# Altium PCB main.PcbDoc
Units mm, origin at the board's own origin, x right, y up, seen from the top; angles counter-clockwise.
Board outline 42.4 x 86 mm, 2 copper layers (Top Layer, Bottom Layer), stack 1.569 mm thick; 13 components, 11 nets, 40 pads, 16 vias.
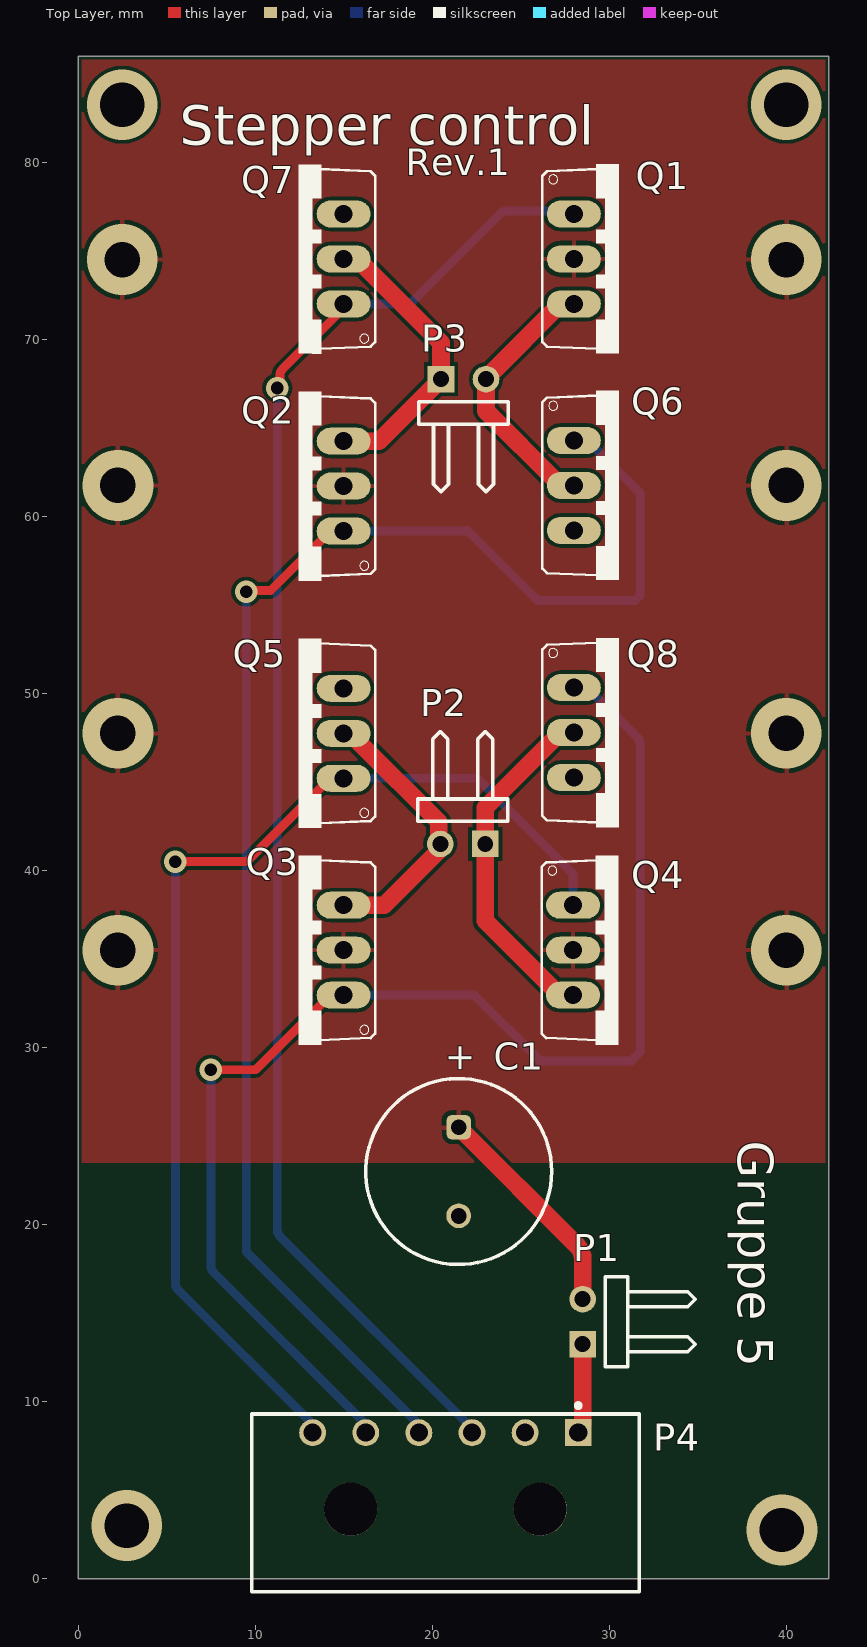
[diagram p0: Top Layer view]
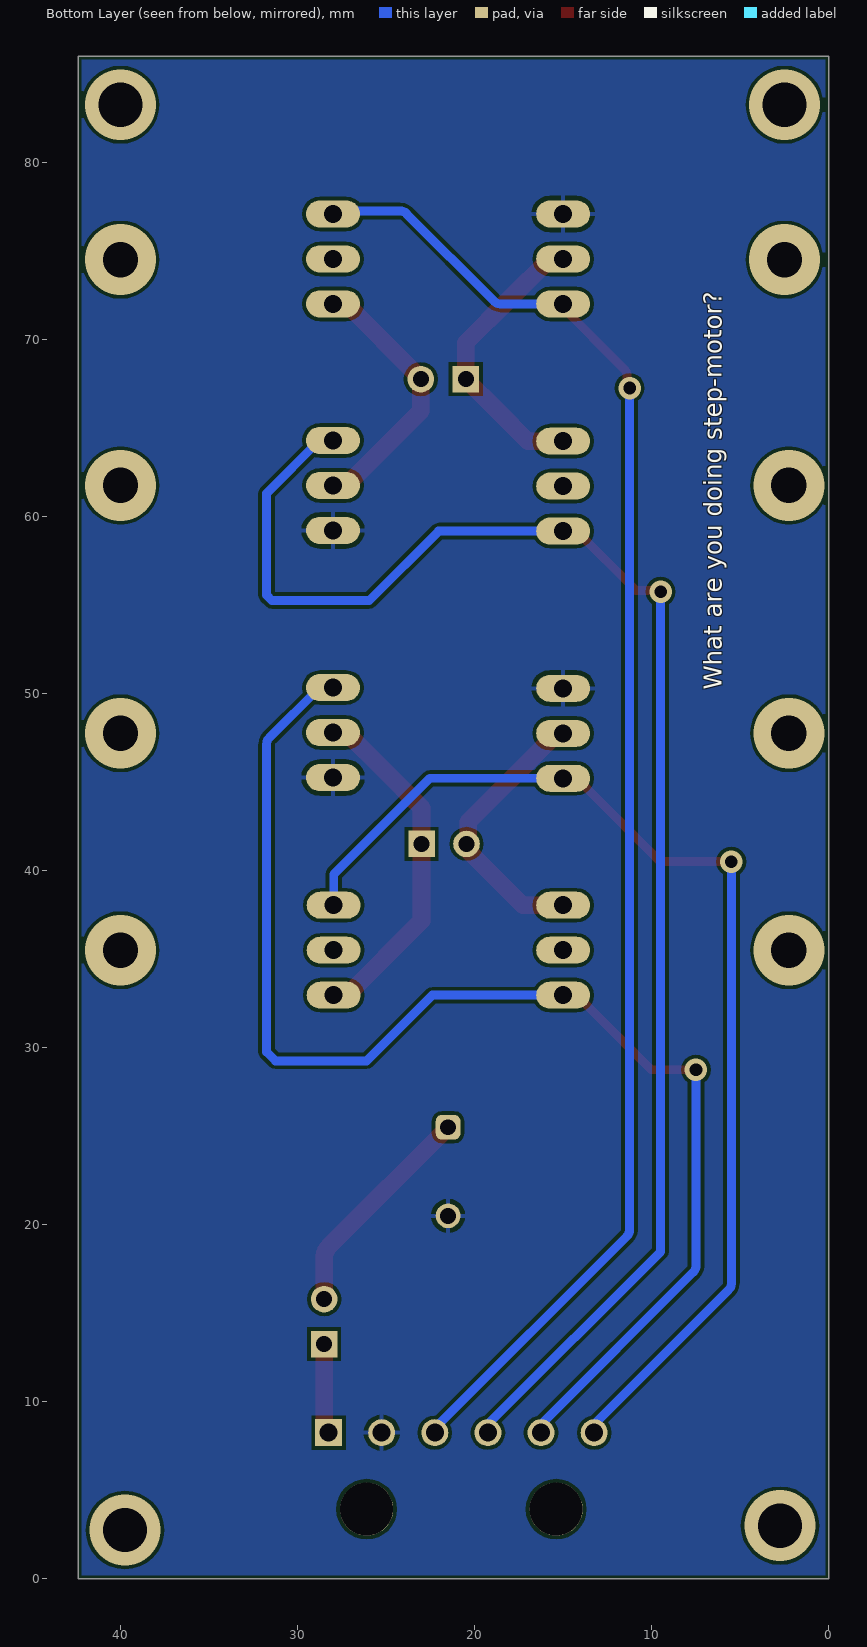
[diagram p1: Bottom Layer view, seen from below]

## Layer stack, top to bottom
Top Solder: solder mask 0.0254, SM-001, Dk 4
Top Layer: signal copper 0.035
Dielectric 1: core 1.4986, Core-043, Dk 4.3
Bottom Layer: signal copper 0.035
Bottom Solder: solder mask 0.0254, SM-001, Dk 4

## Board outline
0,0 0,86 42.4,86 42.4,0

## Design rules (kind name [scope] priority, off if disabled: settings)
BoardOutlineClearance [All] p1: gap=0.2 ignorepadtopadclearanceinfootprint=FALSE except(0: Arc-SplitContinuation Track-SplitContinuation SMDPad-SplitContinuation THPad-SplitContinuation Via-SplitContinuation Fill-SplitContinuation Poly-SplitContinuation Region-SplitContinuation Text-SplitContinuation)
Clearance ClearanceOuter [(OnLayer('Bottom Layer') OR OnLayer('Top Layer'))] p1: gap=0.2 ignorepadtopadclearanceinfootprint=FALSE except(0: SMDPad-Hole THPad-Hole Via-Hole Fill-Hole Poly-Hole Region-Hole Text-Hole; 0.199: Arc-SMDPad Track-SMDPad SMDPad-SMDPad; 0.249: Arc-Arc Arc-Track Track-Track; 0.25: Arc-THPad Arc-Via Track-THPad Track-Via; 0.45: Arc-Hole Track-Hole)
Clearance ClearanceInner [All] p2: gap=0.2 ignorepadtopadclearanceinfootprint=FALSE except(0: Arc-Hole Track-Hole SMDPad-Hole THPad-Hole Via-Hole Fill-Hole Poly-Hole Region-Hole Text-Hole; 0.199: Arc-Arc Arc-Track Arc-SMDPad Track-Track Track-SMDPad SMDPad-SMDPad)
DiffPairsRouting [All] p1: maxlimit=0.5 minlimit=0.5 mostfreqgap=0.5 toplayer_minwidth=0.2 toplayer_maxwidth=0.25 toplayer_prefwidth=0.25 bottomlayer_minwidth=0.2 bottomlayer_maxwidth=0.25 bottomlayer_prefwidth=0.25 maxuncoupledlength=10
HoleSize [All] p1: absolutevalues=TRUE maxlimit=5.35 minlimit=0.25 maxpercent=80.000 minpercent=20.000
HoleToHoleClearance [All] p1: gap=0.3 allowstackedmicrovias=TRUE
MinimumAnnularRing MinimumAnnularRingOuter [(OnLayer('Bottom Layer') OR OnLayer('Top Layer'))] p1: minimumring=0.2
MinimumAnnularRing MinimumAnnularRingInner [All] p2: minimumring=0.2
MinimumSolderMaskSliver [All] p1: minsoldermaskwidth=0.08
PolygonConnect [All] p1: connectstyle=Relief reliefconductorwidth=0.254 reliefentries=4 polygonreliefangle="90 Angle" airgapwidth=0.254
RoutingCorners [All] p1: cornerstyle=45-Degree minsetback=0.2 maxsetback=0.2
RoutingVias [All] p1: holewidth=0.3 width=0.6 viastyle="Through Hole" minholewidth=0.2 minwidth=0.55 maxholewidth=6 maxwidth=12
SilkToSilkClearance [All] p1: silktosilkclearance=0.2
SilkToSolderMaskClearance [IsPad] p1: minsilkscreentomaskgap=0.15 clearancetoexposedcopper=TRUE
SolderMaskExpansion [All] p1: expansion=0.05 istentingtop=FALSE
Width TraceWidthOuter [(OnLayer('Bottom Layer') OR OnLayer('Top Layer'))] p1: maxlimit=10 minlimit=0.2 preferedwidth=0.2 minimp=50.000000 maximp=50.000000 favimp=50.000000
Width TraceWidthInner [All] p2: maxlimit=10 minlimit=0.15 preferedwidth=0.2 minimp=50.000000 maximp=50.000000 favimp=50.000000
23 further rules are at their usual default settings.

## Classes and differential pairs
component class main: C1 P1 P2 P4 Q1 Q2 Q3 Q4 Q5 Q6 Q7

## Components (designator, comment, footprint, x,y, rotation, side; value= is the part's Value field where it differs from the comment)
C1 "100uF, 63V" WCAP-ATG8_D10H12.5 21.5,23 r90 top
P1 "BRYTER" HDR1X2H 28.5,13.25 r90 top
P2 "Spole 2" HDR1X2H 23,41.5 r180 top
P3 "Spole 1" HDR1X2H 20.5,67.75 r0 top
P4 "66200611022" 66200611022 20.75,4.28 r0 top
Q1 "IRF520" TO220BV 30.54,74.54 r270 top
Q2 "IRF520" TO220BV 12.46,61.71 r90 top
Q3 "IRF520" TO220BV 12.46,35.5 r90 top
Q4 "IRF520" TO220BV 30.5,35.5 r270 top
Q5 "IRF520" TO220BV 12.46,47.75 r90 top
Q6 "IRF520" TO220BV 30.54,61.75 r270 top
Q7 "IRF520" TO220BV 12.46,74.54 r90 top
Q8 "IRF520" TO220BV 30.54,47.79 r270 top

## Footprints (in the part's own frame and the unit in brackets; to place one, negate y for a bottom-side part, rotate by r counter-clockwise, add the part's x,y. Pads: shape width x height; smd on the part's side, far side on the other; paste and mask are expansions set on the pad)
66200611022 [mm] "3.00mm Male Single Row Angled Header with Plastic Pegs, 6p"
  rect 1.52x1.52 hole 1.02: 1(7.5,3.97)
  round 1.52 hole 1.02: 2(4.5,3.97) 3(1.5,3.97) 4(-1.5,3.97) 5(-4.5,3.97) 6(-7.5,3.97)
  round 3 hole 3 unplated: MH1(-5.35,-0.35) MH2(5.35,-0.35)
  silkscreen extent -10.95,-5.02 10.95,5.62, body extent -10.83,-4.95 10.83,4.95, height 5.6
HDR1X2H [mm] "Connector; Header; 2 Position; Right Angle"
  rect 1.5x1.5 hole 0.9: 1(0,0)
  round 1.5 hole 0.9: 2(2.54,0)
  silkscreen extent -1.27,-6.35 3.81,-1.27
TO220BV [mil]
  oval 60x120 hole 40: D(0,-100) G(-100,-100) S(100,-100)
  silkscreen extent -210,-170 210,0
WCAP-ATG8_D10H12.5 [mm] "Aluminum Electrolytic Capacitors, 10x12.5mm"
  rrect50% 1.4x1.4 hole 0.9: 1(2.5,0)
  round 1.4 hole 0.9: 2(-2.5,0)
  silkscreen extent -5.25,-5.25 5.25,5.25, body extent -4.99,-5 5,5, height 12.81

## Part data
C1: library part 860010775014, "WCAP-ATG8 Aluminum Electrolytic Capacitor, Radial, THT, D10xH12.5, 100uF, 63V", Capacitance=100uF, Capacitance Tolerance=+/-20%, Leakage Current=63uA, Manufacturer="Wurth Elektronik", Operating Temperature="-40 to +85degC", Rated Voltage=63VDC, Ripple Current=330mA, ComponentLink1Description=Manufacturer, ComponentLink1URL=http://www.we-online.de, ComponentLink2Description=Datasheet, ComponentLink2URL=https://www.we-online.com/catalog/datasheet/860010775014.pdf, Diameter=10mm, Dissipation Factor=9%, Endurance=2000h, Height=12.5mm, Manufacturer Part Number=860010775014, Mounting Technology=THT, Packaging="Ammo Pack", Published Date="October 2020", Technical Reference=ATBF125101M063DSPA9B000
P1 P2 P3: library part "Header 2H", "Header, 2-Pin, Right Angle / BRYTER", LatestRevisionDate=17-Jul-2002, LatestRevisionNote="Re-released for DXP Platform.", Publisher="Altium Limited"
P4: "THT Male Header WR-MPC3, with Snap-in Plastic Pegs, Right Angled, Single Row, pitch 3 mm, 6 pins", Contact Resistance="10 mOhm", Operating Temperature="-40 to 105 degC", Working Voltage="250 VAC", ComponentLink1Description=Manufacturer, ComponentLink1URL=http://www.we-online.de, ComponentLink2Description=Datasheet, ComponentLink2URL=https://katalog.we-online.de/em/datasheet/6620xx11022.pdf, Gender=Male, Mounting Technology=THT, Orientation="Right Angled", Packaging=Tube, Part Number=66200611022, Pin Number=6, Pitch="3 mm", Published Date="September 2018", Publisher="Wurth Elektronik"
Q1 Q2 Q3 Q4 Q5 Q6 Q7 Q8: "N-Channel 100V 9.2A _Tc_ 60W _Tc_ Through Hole TO-220AB", Package="TO-220 Vishay Siliconix", Availability=Unavailable, MF="Vishay Siliconix", MP=IRF520, Price=None, SnapEDA_Link=https://www.snapeda.com/parts/IRF520/Vishay%20Siliconix/view-part/522447/?ref=snap

## Via types
v1: diameter 4, hole 2, Top Layer to Bottom Layer, 8 vias
v2: diameter 4, hole 2.5, Top Layer to Bottom Layer, 4 vias
v3: diameter 1.27, hole 0.711, Top Layer to Bottom Layer, 4 vias

## Nets (pads, with @x,y where several pads share a name; then routed paths per layer and width w, separated by ;. In a path a pad name is that pad's centre, name@x,y a point inside that pad or via, vN(x,y) a via of type N, cw(c..) or ccw(c..) an arc to the next point about the centre after c; other vN are vias at no path point)
5v: C1.1 P1.2 Q1.D Q2.D Q3.D Q4.D | length 12.6
  Top Layer w1: C1.1 28.205,18.795 cw(c27.5,18.086) 28.5,18.086 P1.2
  other v1: 2.25,35.5 40,35.5 2.25,47.75 40,47.75 2.25,61.75 40,61.75 2.5,74.5 40,74.5
GND: C1.2 P4.2 Q5.S Q6.S Q7.S Q8.S
NetP2_1: P2.1 Q4.S Q8.D | length 19.8
  Top Layer w1: Q4.S 27.198,32.96 23,37.158 23,43.552 25.194,45.746 27.067,47.619 27.829,47.619 Q8.D
NetP2_2: P2.2 Q3.S Q5.D | length 15.9
  Top Layer w1: Q3.S 17.29,38.04 20.364,41.114 20.364,41.404 P2.2 20.364,41.596 20.364,42.746 15.862,47.248 15.862,47.508 15.62,47.75 Q5.D
NetP3_1: P3.1 Q2.S Q7.D | length 16.5
  Top Layer w1: Q2.S 17,64.25 18.675,65.925 P3.1 20.5,69.802 18.056,72.246 15.762,74.54 Q7.D
NetP3_2: P3.2 Q1.S Q6.D | length 15.4
  Top Layer w1: P3.2 23.04,67.79 27.42,72.17 Q1.S@28,72.17 ; P3.2@23.04,67.861 23.04,65.948 27.067,61.921 27.829,61.921 Q6.D
NetP4_3: P4.3 Q1.G Q7.G | length 85
  Top Layer w0.5: v3(11.25,67.25) 11.397,67.397 11.397,67.952 cw(c11.897,67.952) 11.544,68.306 15.119,71.881 Q7.G@15.217,71.979
  Bottom Layer w0.5: v3(11.25,67.25) 11.25,19.707 ccw(c11.75,19.707) 11.396,19.354 22.28,8.47 P4.3@22.5,8.47 ; Q7.G 18.543,72 ccw(c18.543,72.5) 18.896,72.146 23.854,77.104 cw(c24.207,76.75) 24.207,77.25 Q1.G@28,77.25
NetP4_4: P4.4 Q2.G Q6.G | length 87.7
  Top Layer w0.5: v3(9.5,55.75) 9.567,55.817 10.885,55.817 14.238,59.17 Q2.G
  Bottom Layer w0.5: v3(9.5,55.75) 9.5,18.47 19.25,8.72 P4.4 ; Q2.G 22.033,59.17 25.953,55.25 31.457,55.25 31.75,55.543 31.75,61.302 28.762,64.29 Q6.G
NetP4_5: P4.5 Q3.G Q8.G | length 74.4
  Top Layer w0.5: v3(7.5,28.75) 10.028,28.75 14.238,32.96 Q3.G
  Bottom Layer w0.5: v3(7.5,28.75) 7.5,17.677 ccw(c8,17.677) 7.646,17.324 16.25,8.72 P4.5 ; Q3.G 22.388,32.96 26.098,29.25 31.25,29.25 31.75,29.75 31.75,47.135 ccw(c31.25,47.135) 31.604,47.488 28.762,50.33 Q8.G
NetP4_6: P4.6 Q4.G Q5.G | length 63.8
  Top Layer w0.5: v3(5.5,40.5) 9.528,40.5 14.238,45.21 Q5.G
  Bottom Layer w0.5: v3(5.5,40.5) 5.5,16.677 ccw(c6,16.677) 5.646,16.324 13.25,8.72 P4.6 ; Q5.G 22.54,45.21 27.96,39.79 Q4.G
VCC: P1.1 P4.1 | length 5.1
  Top Layer w1: P4.1 ccw(c27.5,8.911) 28.5,8.914 P1.1
pads on no net: P4.MH1 P4.MH2
copper on no net:
  other v2: 39.75,2.75 2.75,3 2.5,83.25 40,83.25

## Polygon pours and split planes (outlines as drawn)
GND on Bottom Layer "GND_L02_P000" (solid, pour order 0): -2.5,-4.25 -1.5,-5.25 46.25,-5.25 46.25,90.5 43.75,93 -5.75,93
5v on Top Layer "5V_L01_P001" (solid, pour order 1): -2.483,23.5 46.25,23.5 46.25,87.75 44.25,89.75 -2.75,89.75

## Silkscreen, mask and mechanical layers (free items; w line width, h text height)
Top Overlay:
  text "Stepper control" at 5.75,81 h2.2
  text "Rev.1" at 18.504,79.254 h1.5
  text "Gruppe 5" at 37.25,24.75 h2 r270
Bottom Overlay:
  text "What are you doing step-motor?" at 6.033,50.2 h1 r270

## Text inside footprints (layer, text, board x,y; h text height)
C1: Top Overlay "+" at 22.25,28.55 h1.5 r90